# EAGLE board 433brd (EAGLE 7.5.0)
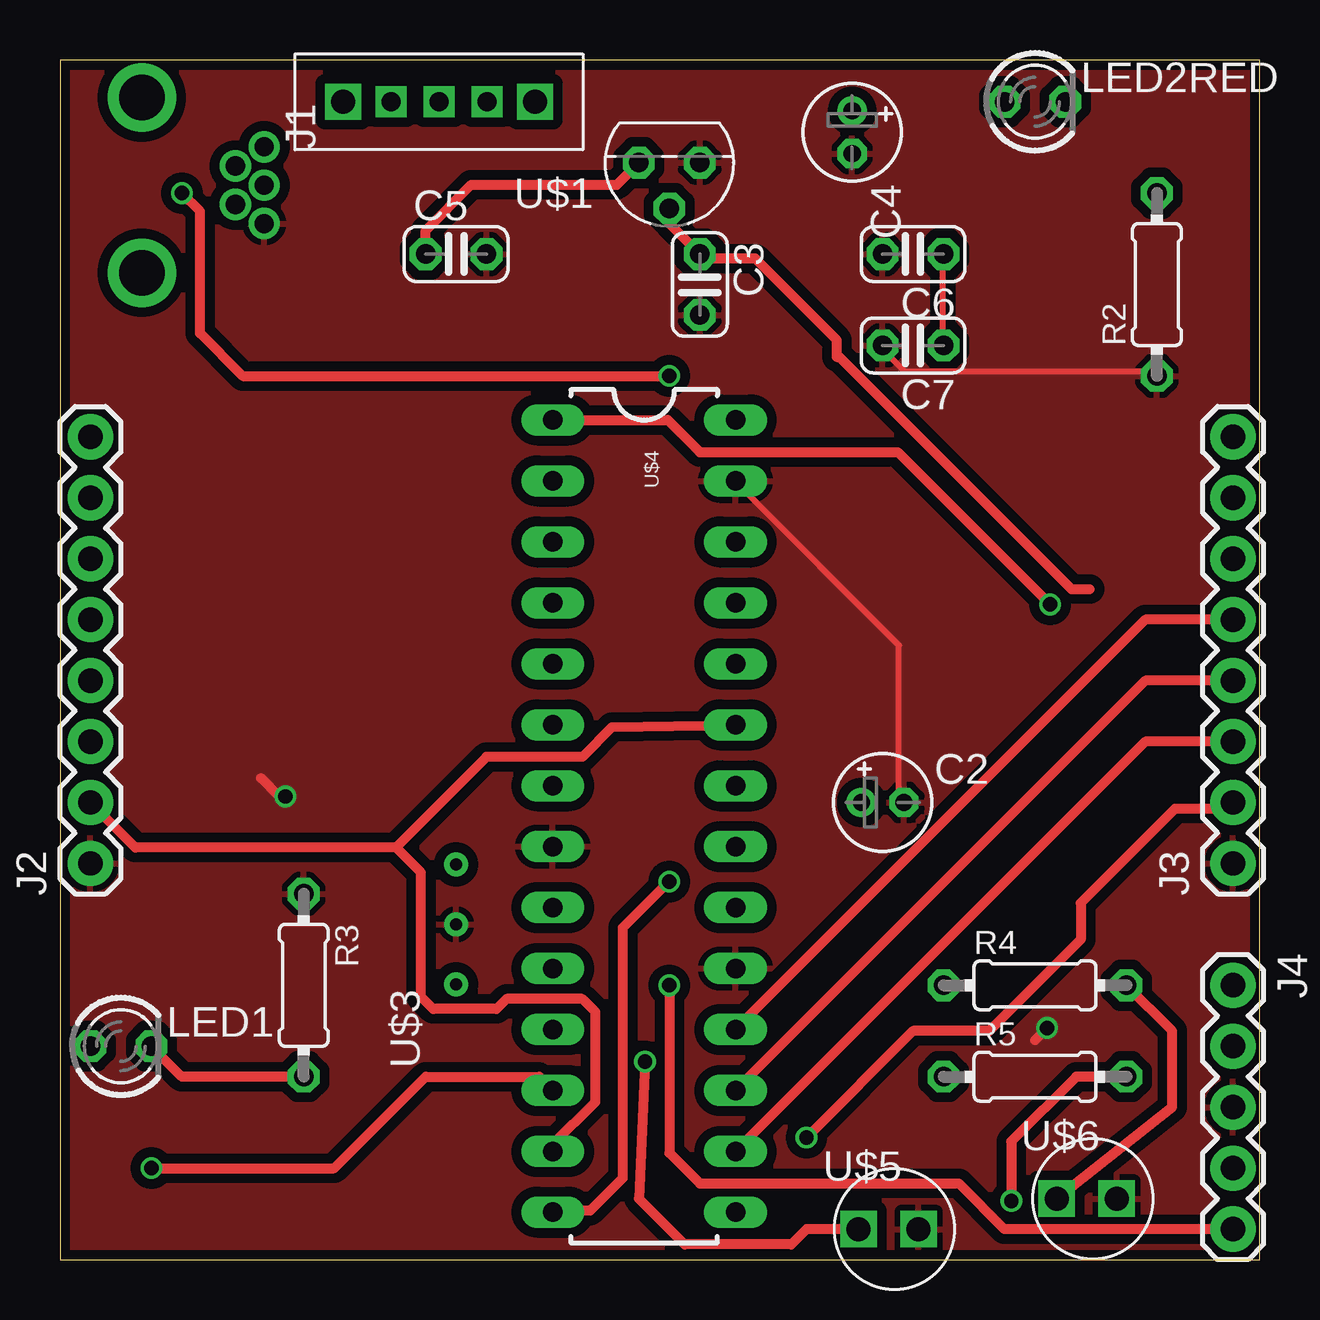
[diagram p0: board, top side]
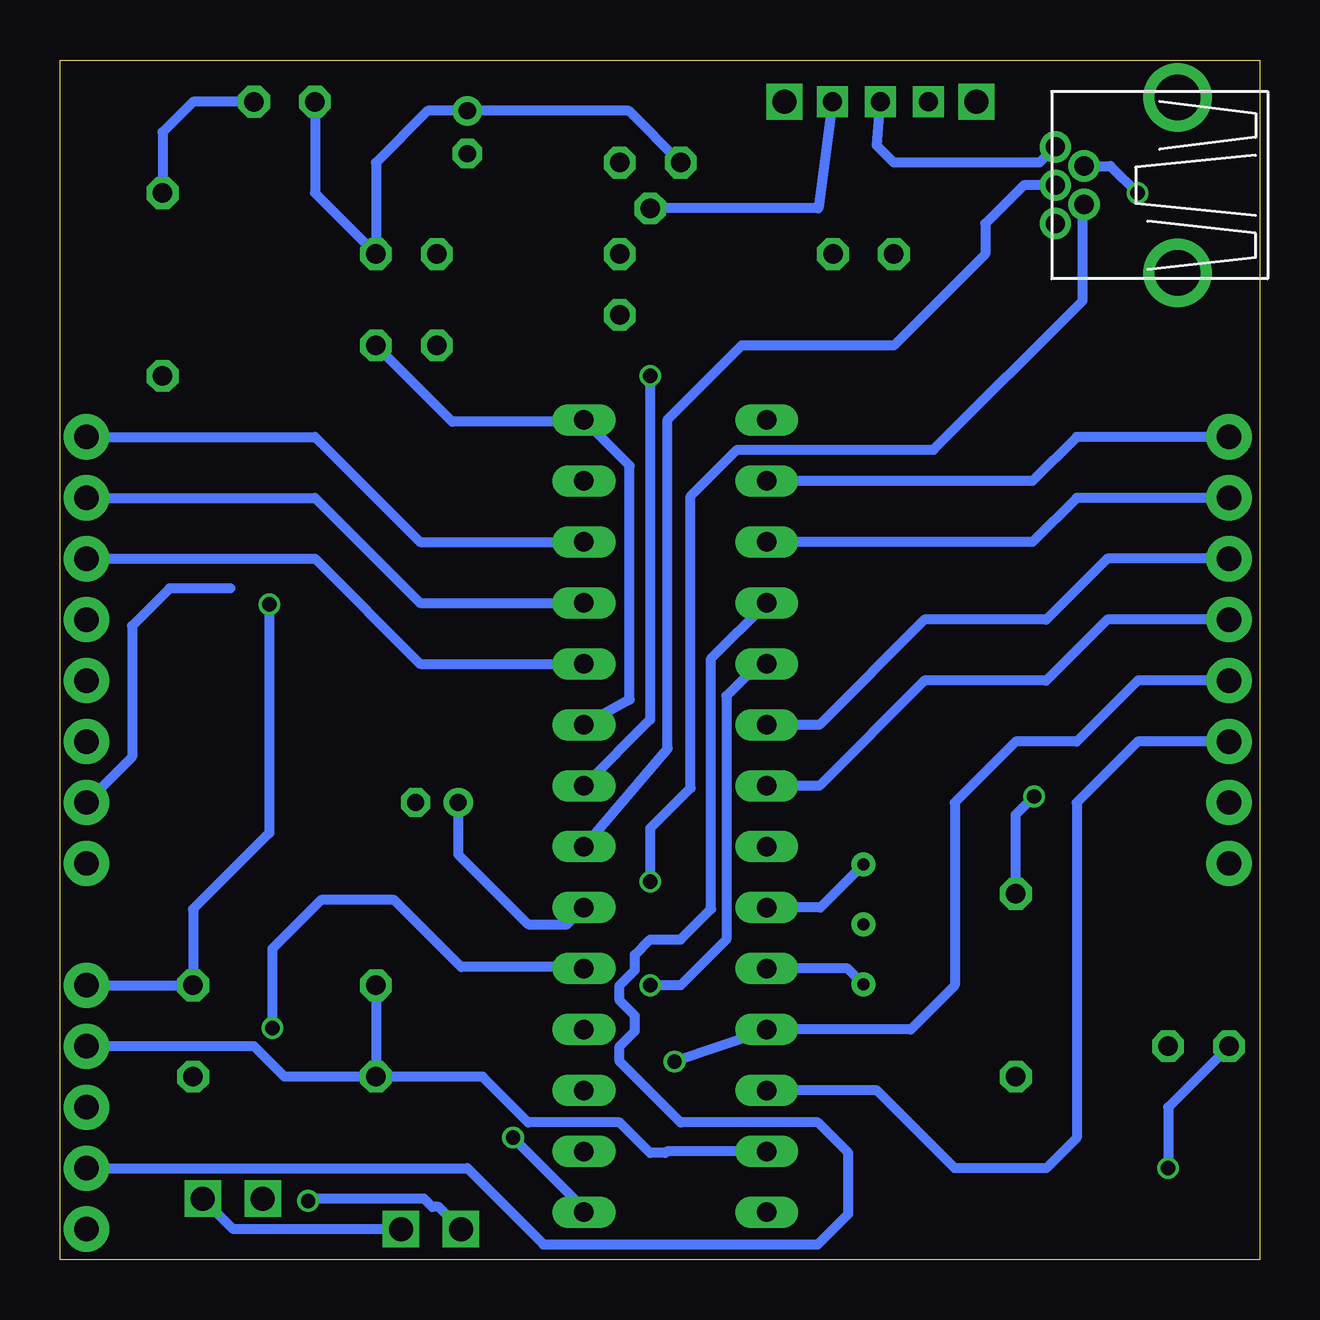
[diagram p1: board, bottom side, seen from below]

Size 50 x 50 mm. Coordinates in mm from the lower left corner, seen from the top.
Outline: 0,0 50,0 50,50 0,50 0,0
Copper layers (1*16): Top 0.035mm / dielectric 1.5mm / Bottom 0.035mm
Design rules "SeeedStudio_2layer_DRU_no_angle_20140221": minimum track width 6mil, minimum drill 12mil, track to track 6mil, track to pad 6mil, pad to pad 6mil, via to via 6mil, smd to smd 0mil, copper to edge 10mil, drill to drill 10mil, minimum pad ring 10mil, minimum via ring 6mil, stop-mask expansion 2mil, vias tented up to drill 100mil, thermal gap 10mil

## Footprints (pad centres in the part's own frame; a part is rotated, then mirrored left to right if it is on the bottom)
E1,8-4 = drill 0.711 pad 1.168: + -0.889,0 | drill 0.711 pad 1.168 octagon: - 0.889,0
C025-024X044 = drill 0.813 octagon: 1 -1.27,0; 2 1.27,0
USB-MB-H = drill 0.8: D+ 5.1,0; D- 3.9,0.8; GND 5.1,-1.6; ID 3.9,-0.8; VBUS 5.1,1.6 | drill 1.9: P$6 0,-3.65; P$7 0,3.65
1X08_ROUND = drill 1.016 pad 1.88: 1 0,0; 2 2.54,0; 3 5.08,0; 4 7.62,0; 5 10.16,0; 6 12.7,0; 7 15.24,0; 8 17.78,0
1X05 = drill 1.016 pad 1.88: 1 0,0; 2 2.54,0; 3 5.08,0; 4 7.62,0; 5 10.16,0
LED3MM = drill 0.813 octagon: A -1.27,0; K 1.27,0
0204/7 = drill 0.813 octagon: 1 -3.81,0; 2 3.81,0
TO92 = drill 0.813 octagon: 1 -1.27,0; 2 0,1.905; 3 1.27,0
SLIDE_SWITCH = drill 0.8 square: P$1 0,0; P$2 -2,0; P$3 2,0 | drill 1 square: P$4 -4,0; P$5 4,0
RESONATOR = drill 0.5: P$1 -2.5,0; P$2 0,0; P$3 2.5,0
DIL28-3 = drill 0.813 long: 1 -16.51,-3.81; 2 -13.97,-3.81; 3 -11.43,-3.81; 4 -8.89,-3.81; 5 -6.35,-3.81; 6 -3.81,-3.81; 7 -1.27,-3.81; 8 1.27,-3.81; 9 3.81,-3.81; 10 6.35,-3.81; 11 8.89,-3.81; 12 11.43,-3.81; 13 13.97,-3.81; 14 16.51,-3.81; 15 16.51,3.81; 16 13.97,3.81; 17 11.43,3.81; 18 8.89,3.81; 19 6.35,3.81; 20 3.81,3.81; 21 1.27,3.81; 22 -1.27,3.81; 23 -3.81,3.81; 24 -6.35,3.81; 25 -8.89,3.81; 26 -11.43,3.81; 27 -13.97,3.81; 28 -16.51,3.81
PUSHBUTTON = drill 1 square: P$1 -1,0; P$2 1.5,0

## Placement (x,y rotation side)
C2  [E1,8-4]  34.29,19.05 0 top
C3  0.1  [C025-024X044]  26.67,40.64 270 top
C4  10  [E1,8-4]  33.02,46.99 270 top
C5  0.1  [C025-024X044]  16.51,41.91 0 top
C6  [C025-024X044]  35.56,41.91 180 top
C7  [C025-024X044]  35.56,38.1 180 top
J1  [USB-MB-H]  3.41,44.78 0 top
J2  [1X08_ROUND]  1.27,16.51 90 top
J3  [1X08_ROUND]  48.9,16.51 90 top
J4  [1X05]  48.9,11.43 270 top
LED1  [LED3MM]  2.54,8.89 0 top
LED2RED  [LED3MM]  40.64,48.26 0 top
R2  330  [0204/7]  45.72,40.64 90 top
R3  [0204/7]  10.16,11.43 270 top
R4  [0204/7]  40.64,11.43 0 top
R5  [0204/7]  40.64,7.62 0 top
U$1  [TO92]  25.4,45.72 180 top
U$2  [SLIDE_SWITCH]  15.8,48.26 180 top
U$3  [RESONATOR]  16.51,13.97 90 top
U$4  [DIL28-3]  24.35,18.48 270 top
U$5  [PUSHBUTTON]  34.29,1.27 0 top
U$6  [PUSHBUTTON]  42.55,2.54 0 top

## Library data of the parts
C2-C7 J1 J4 LED1 LED2RED R2-R5 U$1-U$6 = 433board
J2 J3 = 433board; PROD_ID: CONN-08437

## Nets
+3V3: C4.+ C5.1 C6.1 C7.1 J2.2 J4.2 LED2RED.A R4.1 R5.1 U$1.3 U$4.13 U$4.23 U$4.28
+5V: J3.2 U$4.15
A0: J2.8 U$4.2
A1: J2.7 U$4.3
A4/LED: J2.3 LED1.A U$4.12
B2: J2.6 U$4.6
B3: J2.5 U$4.7
B4/USER: J2.4 R5.2 U$4.11 U$5.P$1
B7: J3.3 U$4.16
B8: J3.4 U$4.17
B9: J3.5 U$4.18
B13: J3.6 U$4.24
B14: J3.7 U$4.25
B15: J3.8 U$4.26
D+: J1.D+ U$4.21
D-: J1.D- U$4.22
GND: C2.- C3.2 C4.- C5.2 C6.2 C7.2 J1.GND J2.1 J3.1 J4.3 R2.1 R3.1 U$1.1 U$3.P$2 U$4.8 U$4.19 U$4.27 U$5.P$2 U$6.P$2
MCLR: J4.1 R4.2 U$4.1 U$6.P$1
N$1: U$3.P$3 U$4.9
N$2: LED2RED.K R2.2
N$3: U$3.P$1 U$4.10
N$4: LED1.K R3.2
N$12: C2.+ U$4.20
PGC: J4.5 U$4.5
PGD: J4.4 U$4.4
S$1: C3.1 U$1.2 U$2.P$2
USBID: J1.ID U$4.14
VBUS: J1.VBUS U$2.P$1

## Tracks (layer width: path | path; a pad name or v marks a point on that pad's centre or on a via)
+3V3
  Top 0.254: C6.1 36.8,41.83 36.8,38.18 C7.1
  Top 0.406: C5.1 15.24,42.89 17.14,44.8 23.21,44.8 U$1.3 | U$4.13 20.54,4.79 22.32,6.57 22.32,10.32 21.78,10.86 18.61,10.86 18.19,10.45 15.56,10.45 15.05,10.95 15.05,16.13 14,17.18 | 14,17.18 3.14,17.18 J2.2 | 14,17.18 17.78,20.95 21.78,20.95 23.02,22.19 U$4.23
  Bottom 0.406: U$1.3 26.29,47.88 C4.+ 34.67,47.88 36.83,45.72 C6.1 39.37,44.45 LED2RED.A | R5.1 40.64,7.62 41.91,8.89 J4.2 | U$4.13 24.7,4.51 24.77,4.45 25.4,4.45 26.67,5.71 30.48,5.71 32.38,7.62 R5.1 | R4.1 R5.1 | C7.1 33.66,34.92 28.57,34.92 28.51,34.99 U$4.28 26.26,33.09 26.26,23.34 U$4.23 28.35,22.29 28.45,22.19
+5V  (via drill 0.6 pad 0.25)
  Top 0.406: v31.11,5.08 35.56,9.53 38.73,9.53 42.55,13.34 42.55,14.86 46.48,18.8 48.64,18.8 J3.2
  Bottom 0.406: U$4.15 28.16,2.12 v31.11,5.08 | 42.89,27.97 45.43,27.97 46.99,26.42 46.99,20.95 J3.2
A0
  Bottom 0.406: J2.8 7.62,34.29 9.46,32.45 U$4.2
A1
  Bottom 0.406: J2.7 7.62,31.75 9.46,29.91 U$4.3
A4/LED  (via drill 0.6 pad 0.25)
  Top 0.406: v3.81,3.81 11.43,3.81 15.24,7.62 19.97,7.62 U$4.12
  Bottom 0.406: J2.3 5.08,21.59 7.62,19.05 7.62,5.08 8.89,3.81 12.7,3.81 15.94,7.05 U$4.12 | LED1.A 3.81,6.35 v3.81,3.81
B2
  Bottom 0.406: J2.6 6.35,29.21 8.89,26.67 13.97,26.67 18.35,22.29 U$4.6
B3
  Bottom 0.406: J2.5 6.35,26.67 8.89,24.13 13.97,24.13 18.35,19.75 U$4.7
B4/USER  (via drill 0.6 pad 0.25)
  Top 0.406: U$5.P$1 31.11,1.27 30.48,0.64 26.04,0.64 24.13,2.54 v24.38,8.26 | R5.2 42.35,7.62 39.66,4.92 v39.66,2.44
  Bottom 0.406: J2.4 5.08,24.13 7.62,21.59 10.16,21.59 12.7,19.05 12.7,11.43 14.54,9.59 U$4.11 20.61,9.53 v24.38,8.26 | U$5.P$1 34.21,2.19 34.48,2.19 34.83,2.54 39.56,2.54 v39.66,2.44
B7
  Top 0.406: J3.3 45.24,21.59 U$4.16
B8
  Top 0.406: J3.4 45.24,24.13 U$4.17
B9
  Top 0.406: J3.5 45.24,26.67 U$4.18
B13
  Bottom 0.406: J3.6 39.37,29.21 34.99,24.83 U$4.24
B14
  Bottom 0.406: J3.7 39.37,31.75 34.99,27.37 U$4.25
B15
  Bottom 0.406: J3.8 39.37,34.29 34.99,29.91 U$4.26
D+
  Bottom 0.406: J1.D+ 9.83,44.78 11.43,43.18 11.43,41.91 15.24,38.1 21.59,38.1 24.67,35.02 24.67,21.3 U$4.21
D-  (via drill 0.6 pad 0.25)
  Top 0.406: v25.4,36.83 7.62,36.83 5.84,38.61 5.84,43.69 v5.08,44.45
  Bottom 0.406: J1.D- 6.21,45.58 v5.08,44.45 | v25.4,36.83 25.4,22.51 U$4.22
GND  (via drill 0.6)
  Top 0.254: R2.1 45.72,37.03 35.2,37.03 34.29,37.95 C7.2 | 48.69,16.46 J3.1 | U$4.27 28.35,32.23 34.98,25.6 34.98,19.2 C2.-
  Top 0.406: 45.78,36.39 45.72,36.45 R2.1 45.88,36.83 | v9.4,19.3 9.14,19.3 8.38,20.07 | v41.15,9.65 40.64,9.14
  Bottom 0.254: 17.83,41.83 C5.2
  Bottom 0.406: U$5.P$2 42.77,1.27 U$6.P$2 | R3.1 10.16,18.54 v9.4,19.3 | U$4.19 28.39,12.13 28.45,12.19 33.27,12.19 36.07,14.99 39.12,14.99 41.15,12.95 v41.15,9.65
  pour Top (isolate 0.406): 0,0 50.29,0 50.29,49.78 0,49.78
MCLR  (via drill 0.6 pad 0.25)
  Top 0.406: R4.2 46.35,9.53 46.35,6.35 U$6.P$1 | U$4.1 25.34,34.99 26.67,33.66 34.92,33.66 v41.27,27.3
  Bottom 0.406: J4.1 R4.2 44.45,14.61 41.27,17.78 v41.27,27.3
N$1
  Bottom 0.406: U$3.P$3 18.31,14.67 U$4.9
N$2
  Bottom 0.406: LED2RED.K 44.45,48.26 45.72,46.99 R2.2
N$3
  Bottom 0.406: U$3.P$1 17.17,12.13 U$4.10
N$4
  Top 0.406: R3.2 5.08,7.62 LED1.K
N$12
  Bottom 0.406: C2.+ 33.4,16.89 30.48,13.97 28.86,13.97 U$4.20
PGC  (via drill 0.6 pad 0.25)
  Top 0.406: v25.4,11.43 25.4,4.45 26.67,3.17 37.47,3.17 39.37,1.27 J4.5
  Bottom 0.406: U$4.5 20.89,24.83 22.23,23.5 22.23,13.34 24.13,11.43 v25.4,11.43
PGD
  Bottom 0.406: J4.4 33.02,3.81 29.84,0.64 18.41,0.64 17.14,1.91 17.14,4.45 18.41,5.71 24.13,5.71 26.67,8.26 26.67,8.89 26.04,9.53 26.04,10.16 26.67,10.79 26.67,11.43 26.04,12.06 26.04,12.7 25.4,13.34 24.13,13.34 22.86,14.61 22.86,25.05 U$4.4
S$1
  Top 0.406: U$1.2 25.4,43.18 C3.1 26.86,41.72 28.99,41.72 32.38,38.32 32.38,37.62 32.48,37.62 42.16,27.94 42.93,27.94
  Bottom 0.406: U$2.P$2 18.39,43.81 U$1.2
USBID  (via drill 0.6)
  Top 0.406: v25.4,15.75 25.37,15.75 23.46,13.84 23.46,3.4 22.1,2.03 20.6,2.03 U$4.14
  Bottom 0.406: J1.ID 7.37,43.92 7.37,39.97 13.59,33.75 21.78,33.75 23.72,31.81 23.72,19.65 25.4,17.97 v25.4,15.75
VBUS
  Bottom 0.406: J1.VBUS 9.17,45.72 15.24,45.72 15.95,46.43 U$2.P$1